# Altium PCB PCB1.PcbDoc (part 3 of 3)
Units mm, origin at the board's own origin, x right, y up, seen from the top; angles counter-clockwise.
Board outline 65.15 x 55.25 mm, 4 copper layers (Top Layer, Int1 (GND), Int2 (PWR), Bottom Layer), stack 1.369 mm thick; 135 components, 113 nets, 463 pads, 324 vias.
Unrouted connection lines stored in the file: 1.
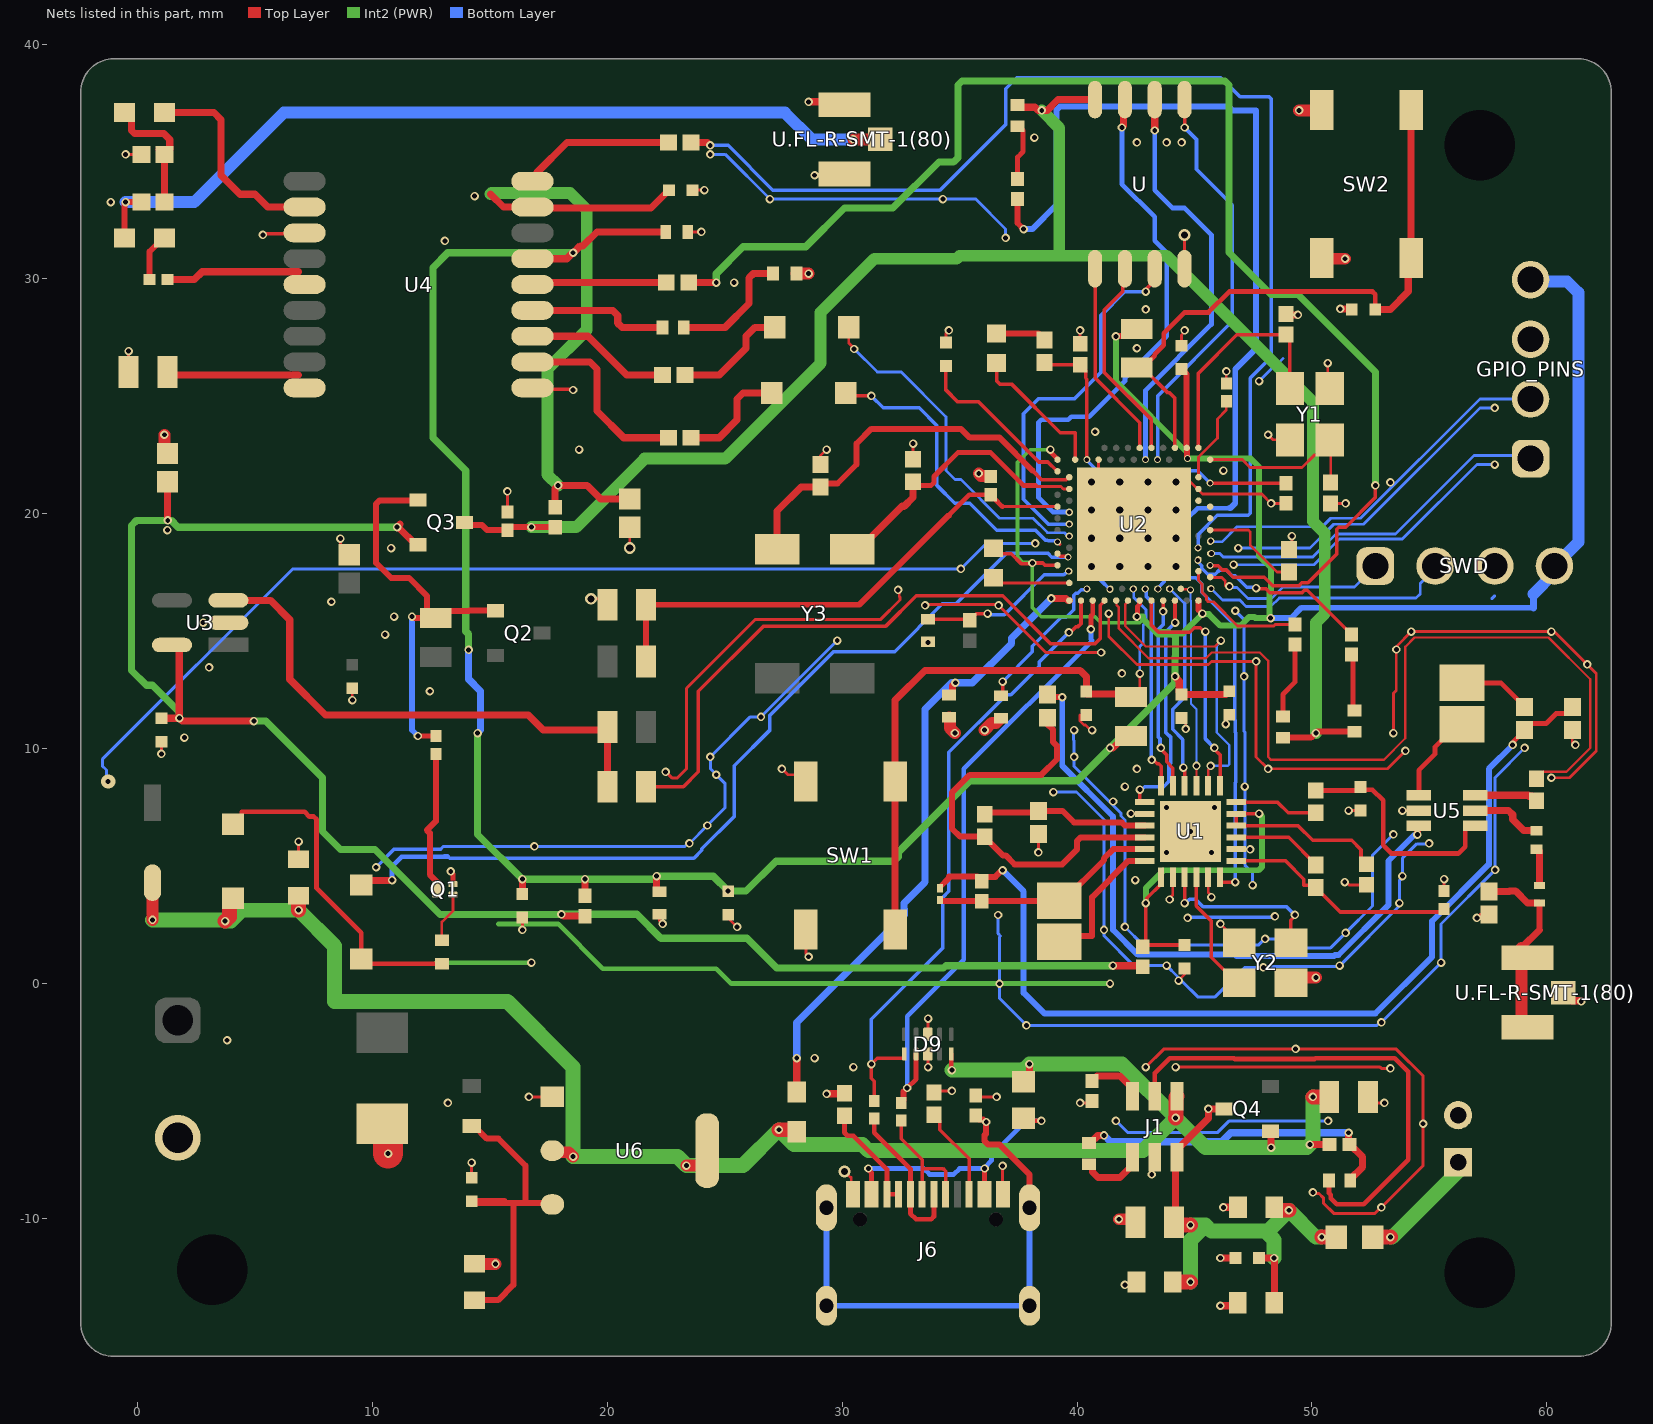
[diagram p4: the nets of this part, all layers, seen from the top]

## Via types
v1: diameter 0.36, hole 0.21, Top Layer to Bottom Layer, 294 vias
v2: diameter 0.3, hole 0.2, Top Layer to Bottom Layer, 24 vias
v3: diameter 0.5, hole 0.3, Top Layer to Bottom Layer, 4 vias
v4: diameter 0.6, hole 0.21, Top Layer to Bottom Layer, 1 vias
v5: diameter 0.5, hole 0.21, Top Layer to Bottom Layer, 1 vias

## Nets (pads, with @x,y where several pads share a name; then routed paths per layer and width w, separated by ;. In a path a pad name is that pad's centre, name@x,y a point inside that pad or via, vN(x,y) a via of type N, cw(c..) or ccw(c..) an arc to the next point about the centre after c; other vN are vias at no path point) (continued)
GND: C1.2 C2.1 C4.2 C5.2 C8.1 C9.2 C11.2 C12.2 C13.2 C14.2 C15.2 C16.2 C17.2 C18.2 C19.2 C20.2 C21.2 C22.1 C24.1 C25.1 C26.2 C27.2 C28.2 C29.2 C30.2 C31.1 C32.2 C33.1 C34.2 C35.2 C39.2 C40.1 C42.2 C43.1 C44.2 C45.2 C46.2 C47.2 C48.1 C49.2 C50.2 C51.2 C52.2 C53.2 C5210584.2 D9.3 D9.8 D11.1 GPIO_PINS.3 J1.2 J6.A1_B12 J6.B1_A12 Q1.2 R2.1 R9.1 R14.2 R17.2 R18.2 R21.1 R26.1 R29.2 R32.2 S2B-PH-K-S(LF)(SN).2 SW1.1 SW1.2 SW2.1 SW2.2 SWD.3 U1.2 U1.5 U1.8 U1.20 U1.25 U2.74 U2.74_1 U2.74_2 U2.74_3 U2.74_4 U2.74_5 U2.74_6 U2.74_7 U2.74_8 U2.74_9 U2.74_10 U2.74_11 U2.74_12 U2.74_13 U2.74_14 U2.74_15 U2.74_16 U2.B7 U2.F23 U3.2 U4.1 U4.12 U5.2 U6.1 U.4 U.FL-R-SMT-1(80).1@60.707,-0.381 U.FL-R-SMT-1(80).2@30.099,37.416 U.FL-R-SMT-1(80).3@30.099,34.466 Y1.2 Y1.4 Y2.2 Y2.4 | length 418.7
  Top Layer w0.12: v1(-0.508,35.306) C22.1@0.163,35.306 ; v1(-0.381,26.924) R9.1@-0.38,26.035 R9.1@-0.38,26.035 ; v1(1.016,9.779) C52.2@1.016,10.295 ; v1(2.794,15.367) U3.2@3.868,15.367 ; C53.2@6.858,5.296 v1(6.858,6.045) ; v1(8.636,18.949) 8.636,18.635 C43.1@9.017,18.254 ; v1(9.144,12.065) C48.1@9.144,12.573 ; C49.2@14.224,-8.263 v1(14.224,-7.62) ; C45.2@14.351,-11.925 14.417,-11.925 C45.2@14.732,-11.61 ; C31.1@15.748,20.084 v1(15.748,20.955) ; v1(16.383,2.286) C30.2@16.383,2.81 ; v1(16.66,-4.826) 17.656,-4.826 U6.1@17.66,-4.822 ; v3(19.304,16.383) 19.749,16.383 R2.1@20.003,16.129 ; v3(20.955,18.542) C14.2@20.955,19.431 ; C12.2@22.225,2.954 22.225,2.667 v1(22.352,2.54) ; C11.2@23.429,32.004 v1(24.003,32.004) ; C19.2@23.622,33.782 v1(24.13,33.782) ; C28.2@25.146,2.929 25.146,2.794 v1(25.527,2.413) ; v1(27.432,9.144) 27.687,8.889 28.175,8.889 SW1.1@28.453,8.611 ; SW1.2@28.453,2.311 28.453,1.265 v1(28.575,1.143) ; v1(28.829,34.417) 30.05,34.417 30.099,34.466 ; C24.1@29.083,22.098 29.083,22.479 v1(29.337,22.733) ; R18.2@30.071,-4.699 R18.2@30.099,-4.671 ; v3(30.099,-8.001) 30.353,-8.255 30.385,-8.255 J6.A1_B12@30.385,-8.896 ; C25.1@33.02,22.323 v1(33.02,22.987) ; D9.3@33.647,-2.994 33.655,-3.002 v1(33.655,-3.556) ; D9.8@33.647,-2.159 33.651,-2.155 33.651,-1.493 v1(33.655,-1.489) ; v1(33.655,14.514) C15.2@33.655,14.559 ; R17.2@33.909,-4.638 33.975,-4.572 v1(34.671,-4.572) ; C13.2@34.417,27.297 34.417,27.686 v1(34.544,27.813) ; R21.1@35.687,-4.771 35.742,-4.826 v1(36.576,-4.826) ; J6.B1_A12@36.83,-8.737 v1(36.83,-7.759) ; v1(38.354,5.588) C40.1@38.354,6.368 ; v1(40.132,-5.08) 40.557,-5.08 R29.2@40.64,-4.997 ; 40.132,11.438 40.132,11.177 40.301,11.008 40.362,11.008 40.575,10.795 v1(40.64,10.795) ; C2.1@40.132,27.237 v1(40.132,27.813) ; U2.74_1@40.618,21.358 40.618,21.437 40.918,21.737 U2.B7@40.918,22.308 ; v1(41.35,15.75) 41.35,14.784 42.549,13.585 45.589,13.585 45.72,13.716 v1(47.625,13.716) ; v1(42.037,-12.827) 42.405,-12.827 C47.2@42.532,-12.7 ; v1(42.291,7.239) 42.297,7.233 42.88,7.233 U1.20@42.886,7.227 ; v1(43.18,-8.128) 43.18,-7.523 J1.2@43.307,-7.396 ; v1(43.942,3.579) 43.942,3.644 44.075,3.777 44.075,4.526 U1.2@44.081,4.532 ; U2.74_4@44.218,21.358 44.835,21.358 45.135,21.058 U2.F23@45.168,21.058 45.168,21.016 45.339,20.845 47.862,20.845 v1(48.26,20.447) C1.2@48.895,20.447 ; v1(44.323,0.127) 44.577,0.381 C34.2@44.577,0.643 ; C29.2@44.45,11.311 44.626,11.134 v1(44.626,10.844) ; C27.2@44.45,27.162 44.45,27.621 44.577,27.748 v1(44.577,27.813) ; U.4@44.577,30.436 v3(44.577,31.877) ; U1.5@45.581,4.532 45.587,4.526 45.587,3.881 45.72,3.748 v1(45.72,3.683) ; v1(46.101,2.54) 46.902,1.739 Y2.2@46.906,1.739 ; v1(46.331,11.049) 46.331,11.295 C9.2@46.482,11.446 ; v1@46.339,26.049 v1(46.355,26.065) C4.2@46.355,25.552 ; U1.8@46.776,5.727 46.782,5.721 47.365,5.721 v1(47.371,5.715) ; C44.2@46.787,-13.653 C44.2@46.85,-13.589 ; v1@47.595,13.686 47.625,13.655 47.625,9.652 v1(48.133,9.144) 53.213,9.144 v1(53.975,9.906) ; v1(48.133,23.368) 48.344,23.157 Y1.2@49.061,23.157 ; C5.2@49.022,18.483 49.149,18.61 v1(49.149,19.05) ; v1(50.673,26.416) 50.673,25.445 Y1.4@50.761,25.357 ; C16.2@50.8,20.447 v1(51.435,20.447) ; v1(51.399,4.318) 51.464,4.318 51.591,4.191 52.315,4.191 C33.1@52.324,4.2 ; v1(51.562,7.366) 51.57,7.374 C35.2@52.07,7.374 ; R32.2@52.387,-4.826 52.641,-5.08 v1(53.086,-5.08) ; v1(53.467,10.668) 53.467,12.36 53.594,12.487 v1(53.594,14.224) 53.619,14.249 53.619,14.376 v1(54.229,14.986) v1(60.198,14.986) 60.223,14.961 60.35,14.961 v1(61.722,13.589) 62.103,13.208 62.103,9.906 60.96,8.763 v1(60.198,8.763) ; v1(53.848,7.366) U5.2@54.553,7.366 ; C42.2@55.626,3.935 v1(55.626,4.445) ; v1(57.023,2.794) 57.168,2.939 C32.2@57.531,2.939 ; C39.2@61.087,10.795 61.087,10.287 v1(61.214,10.16)
  Top Layer w0.127: v1(22.479,9.017) 22.495,9.017 22.749,8.763 22.987,8.763 23.368,9.144 23.368,12.573 26.289,15.494 31.623,15.494 32.459,16.33 32.459,16.457 32.43,16.486 32.43,16.719 v1(32.385,16.764) ; v1(33.528,16.105) 33.564,16.141 36.626,16.141 38.67,14.097 v1(41.021,14.097) ; v1(42.926,-3.556) 43.688,-2.794 49.29,-2.794 v1(49.305,-2.78) ; v1(44.196,-3.556) 52.906,-3.556 52.957,-3.607 v1(53.34,-3.607) ; v1@49.276,-2.794 53.594,-2.794 54.737,-3.937 54.737,-7.747 v1(52.959,-9.525) 52.943,-9.525 52.689,-9.779 50.927,-9.779 50.486,-9.338 50.486,-9.117 50.303,-8.935 50.083,-8.935 v1(50.038,-8.89)
  Top Layer w0.152: v1(5.334,31.877) 5.374,31.917 7.066,31.917 U4.12@7.112,31.963 ; U4.1@16.812,25.363 16.862,25.313 18.502,25.313 v1(18.542,25.273)
  Top Layer w0.203: v1(13.335,4.775) 13.335,4.762 13.431,4.666 Q1.2@13.431,4.238
  Top Layer w0.305: v1(28.575,37.543) 29.972,37.543 30.099,37.416 ; v1(29.337,-4.699) 29.348,-4.688 30.06,-4.688 R18.2@30.071,-4.699 ; v1(46.101,-13.716) 46.723,-13.716 C44.2@46.787,-13.653 ; v1(46.101,-11.684) C50.2@46.744,-11.684 ; v1(46.228,-9.525) C46.2@46.85,-9.525 ; C17.2@48.895,28.507 48.93,28.472 v1(49.403,28.472) ; v1(51.205,28.726) 51.215,28.715 51.684,28.715 C26.2@51.697,28.702 ; 60.707,-0.381 61.055,-0.729 61.435,-0.729 v1(61.468,-0.762)
  Top Layer w0.508: v1(1.143,23.368) 1.143,22.699 C51.2@1.27,22.572 ; C45.2@14.351,-11.925 14.364,-11.938 v1(15.24,-11.938) ; R14.2@28.059,30.226 v1(28.575,30.226) ; C21.2@34.544,11.336 34.561,11.336 34.59,11.307 34.59,10.876 v1(34.797,10.669) ; v1(35.814,21.717) 35.915,21.616 36.316,21.616 36.322,21.61 C8.1@36.322,21.59 ; v1(36.068,10.795) 36.375,11.102 36.55,11.102 C20.2@36.722,11.274 ; v1(41.783,-10.033) 42.355,-10.033 R26.1@42.482,-10.16 ; Y2.4@49.106,0.039 49.321,0.254 v1(50.165,0.254) ; v1(49.457,37.176) 50.414,37.176 SW2.1@50.424,37.186 ; SW2.2@50.424,30.886 50.449,30.861 v1(51.411,30.861)
  Top Layer w1.27: D11.1@10.414,-5.969 10.445,-5.969 10.668,-6.192 v1(10.668,-7.239)
  Int2 (PWR) w0.203: 12.7,0.889 v1(16.764,0.889) ; 15.367,2.54 17.907,2.54 19.812,0.635 24.638,0.635 25.273,0 36.692,0 v1(36.697,-0.006) ; v1@36.697,0 v1(41.402,0)
  Bottom Layer w0.12: v1@46.681,17.835 50.093,17.835 51.181,18.923 53.848,18.923 57.023,22.098 v1(57.785,22.098) ; v1(46.863,18.542) 49.911,18.542 50.927,19.558 52.197,19.558 57.15,24.511 v1(57.785,24.511) ; 57.658,16.383 57.785,16.51
  Bottom Layer w0.127: v4(-1.25,8.6) -1.327,8.677 -1.327,9.09 -1.5,9.263 -1.5,9.549 6.604,17.653 v1(35.052,17.653) 36.139,18.74 38.22,18.74 v1(38.221,18.742) ; 12.912,5.728 13.026,5.842 23.305,5.842 23.432,5.969 v1(23.495,5.969) v1(24.257,6.731) 25.019,7.493 25.019,8.509 v1(24.638,8.89) 24.638,8.906 24.384,9.16 v1(24.384,9.652) 26.09,11.358 v1(26.543,11.358) v1(29.79,14.605) ; v1(24.384,35.306) 25.019,35.306 v1(26.924,33.401) v1(34.29,33.401) 35.687,33.401 36.957,32.131 v1(36.957,31.75) ; v1(36.642,2.919) 36.642,2.124 36.745,2.021 36.703,1.979 v1@36.703,0 ; v1(38.989,8.154) 39.979,8.154 41.148,6.985 v1(41.148,2.286) 41.148,2.032 42.418,0.762 v1(43.815,0.762) 44.278,0.299 44.278,0.235 44.323,0.191 44.386,0.191 44.386,0.127 44.431,0.082 44.495,0.082 45.138,-0.561 45.88,-0.561 47.127,0.686 47.825,0.686 47.879,0.74 47.879,0.762 47.917,0.724 51.143,0.724 v1(51.181,0.762) 53.697,3.278 53.697,3.405 v1(53.721,3.429) 53.721,4.382 53.848,4.509 53.848,5.334 54.467,5.953 54.975,5.953 v1(54.991,5.969) ; v1(39.878,10.795) 39.85,10.767 39.85,10.361 39.878,10.333 39.878,9.245 v1@41.452,7.67 ; v1(41.535,7.753) v1@41.452,7.67 ; v1(41.656,-5.842) 42.164,-6.35 45.974,-6.35 46.482,-5.842 v1(50.685,-5.842) ; v1(46.736,15.875) 47.117,15.494 v1(47.117,13.081) 47.117,10.729 47.141,10.705 v1@47.141,8.406 ; v1(47.141,8.382) 47.141,5.043 47.475,4.71 v1(47.475,4.191) ; v1(47.752,25.654) 48.372,26.274 48.425,26.274 48.768,26.617 ; v1(47.933,0.686) v1@47.933,0.762 ; v1(53.467,6.35) 52.583,5.466 52.583,3.307 v1(51.435,2.159) 50.8,1.524 49.526,1.524 49.145,1.905 47.99,1.905 47.736,1.651 42.799,1.651 v1(42.037,2.413) 42.037,6.969 41.869,7.137 41.869,7.253 v1@41.452,7.67 ; v1(59.055,10.033) 57.801,8.779 v1(57.801,4.842) 55.499,2.54 v1(55.499,0.889) v1(52.959,-1.651) 52.896,-1.651 52.769,-1.778 v1(37.846,-1.778) 36.697,-0.629 v1(36.697,-0.006) ; v1(36.697,-0.006) v1@36.703,0 ; v1(36.697,-0.006) v1@36.703,0
  Bottom Layer w0.152: v1(10.16,4.953) 10.935,5.728 12.912,5.728 ; v1(44.704,2.794) 44.738,2.828 48.393,2.828 v1(48.426,2.861)
  other v1: 54.737,-5.969 13.208,-5.08 30.48,-3.556 28.829,-3.175 3.81,-2.413 48.006,1.905 42.478,4.406 53.848,4.572 43.815,5.588 45.72,5.588 16.891,5.842 44.831,6.477 43.815,7.493 45.847,7.493 42.037,8.382 42.545,9.144 39.878,9.652 1.993,10.474 12.446,12.446 41.91,13.208 3.048,13.462 10.541,14.859 10.922,15.621 36.662,16.105 8.255,16.256 46.67,17.835 10.795,18.542 1.27,19.304 53.34,21.336 46.228,21.844 18.796,22.733 40.767,23.495 42.545,27.051 42.926,28.702 25.4,29.845 13.081,31.623 -1.143,33.274 14.351,33.528 42.545,35.814 43.815,35.814 44.45,35.814 38.181,36.022
"Net3.7 V CELL_1": F1.1 S2B-PH-K-S(LF)(SN).1 | length 4.8
  Top Layer w0.635: F1.1@52.591,-10.795 v1(53.34,-10.795)
  Int2 (PWR) w0.635: v1(53.34,-10.795) 53.414,-10.795 56.224,-7.985
NetC1_1: C1.1 C2.2 L3.1 U2.B5 U2.E24 | length 14.6
  Top Layer w0.15: L3.1@38.608,26.445 38.696,26.357 C2.2@40.132,26.357 40.367,26.122 40.367,25.785 40.418,25.734 v2(40.418,22.308) ; v2(45.668,21.308) 48.891,21.308 C1.1@48.895,21.304
  Bottom Layer w0.15: v2(40.418,22.308) 40.418,22.281 40.866,21.833 45.143,21.833 v2(45.668,21.308)
NetC4_1: C4.1 U2.D23 | length 3.7
  Top Layer w0.12: U2.D23@45.168,21.558 45.168,22.416 45.974,23.222 45.974,24.033 46.355,24.414 C4.1@46.355,24.795
NetC5_1: C5.1 U2.N24 | length 4.4
  Top Layer w0.12: U2.N24@45.668,19.308 47.297,19.308 47.371,19.234 47.371,18.669 48.514,17.526 C5.1@49.022,17.526
NetC8_2: C8.2 R1.1 R2.2 U2.J1 | length 22.1
  Top Layer w0.127: 36.824,20.308 U2.J1@39.168,20.308
  Top Layer w0.203: 34.544,19.939 35.415,20.81 C8.2@36.322,20.81 36.322,20.79 36.48,20.632 36.5,20.632 36.824,20.308
  Top Layer w0.254: R1.1@21.653,13.716 R2.2@21.653,16.129 30.734,16.129 34.544,19.939
NetC13_1: C13.1 U2.C1 | length 7.2
  Top Layer w0.154: C13.1@34.417,26.297 34.417,25.273 34.925,24.765 35.814,24.765 38.37,22.209 38.754,22.209 39.155,21.808 U2.C1@39.168,21.808
NetC16_1: C16.1 U2.B24 Y1.3 | length 7.6
  Top Layer w0.12: U2.B24@45.668,22.308 47.034,22.308 47.371,21.971 49.575,21.971 50.121,22.517 50.221,22.517 50.761,23.057 50.761,23.157 50.8,23.118 C16.1@50.8,21.327
NetC17_1: C17.1 U2.A23 Y1.1 | length 9.9
  Top Layer w0.15: U2.A23@45.168,22.808 45.168,25.991 46.804,27.627 48.875,27.627 49.061,27.441 Y1.1@49.061,25.357
NetC18_1: C18.1 R10.1 SW1.3 SW1.4 U2.AC13 | length 26.2
  Top Layer w0.12: R10.1@42.291,12.192 42.307,12.192 42.672,12.557 v1(42.672,13.195)
  Top Layer w0.305: SW1.4@32.253,2.311 SW1.3@32.253,8.611 32.253,12.06 33.528,13.335 40.132,13.335 40.395,13.072 C18.1@40.395,12.438 ; C18.1@40.395,12.332 42.151,12.332 R10.1@42.291,12.192
  Bottom Layer w0.12: v2(42.388,16.803) 42.412,16.779 42.412,16.44 42.935,15.917 42.935,15.382 42.816,15.262 42.816,14.498 42.672,14.354 v1(42.672,13.195)
NetC20_1: C20.1 U2.AC5 | length 6.4
  Top Layer w0.15: C20.1@36.768,12.253 36.83,12.315 v1(36.83,12.853)
  Bottom Layer w0.15: v1(36.83,12.853) 38.1,14.122 38.1,14.367 39.329,15.597 39.538,15.597 39.857,15.916 39.857,16.528 39.945,16.616 40.032,16.616 40.183,16.768 40.378,16.768 v2(40.418,16.808)
NetC22_2: C22.2 C23.1 R20.2 | length 5.9
  Top Layer w0.305: R20.2@-0.557,37.084 -0.507,37.084 -0.259,36.836 -0.259,36.327 -0.127,36.195 1.113,36.195 1.371,35.937 1.371,35.514 1.367,35.51 0.919,35.51 1.123,35.306 C22.2@1.143,35.306 C23.1@1.143,33.274
NetC23_2: C23.2 R19.2 U.FL-R-SMT-1(80).1@31.624,35.941 | length 36.4
  Top Layer w0.254: R19.2@-0.557,31.75 -0.557,33.225 v1(-0.508,33.274) C23.2@0.163,33.274
  Top Layer w0.508: v1(30.48,35.941) 31.624,35.941
  Bottom Layer w0.508: v1(-0.508,33.274) 2.413,33.274 6.223,37.084 27.559,37.084 28.702,35.941 v1(30.48,35.941)
NetC24_2: C24.2 U2.D2 Y3.1 | length 17
  Top Layer w0.152: 38.1,21.844 38.488,21.456 39.271,21.456 39.533,21.456 39.635,21.558 U2.D2@39.668,21.558
  Top Layer w0.254: C24.2@29.083,21.141 29.233,21.291 29.8,21.291 30.607,22.098 30.607,22.987 31.242,23.622 35.052,23.622 35.433,23.241 36.703,23.241 38.1,21.844
  Top Layer w0.305: Y3.1@27.229,18.498 27.229,20.117 28.253,21.141 C24.2@29.083,21.141
NetC25_2: C25.2 U2.F2 Y3.4 | length 12.3
  Top Layer w0.127: 38.227,21.209 38.277,21.159 39.313,21.159 39.414,21.058 U2.F2@39.668,21.058
  Top Layer w0.203: C25.2@33.02,21.365 33.176,21.209 33.79,21.209 33.909,21.328 33.909,21.59 34.925,22.606 36.322,22.606 37.719,21.209 38.227,21.209
  Top Layer w0.305: Y3.4@30.429,18.498 30.729,18.498 32.551,20.32 32.639,20.32 33.02,20.701 C25.2@33.02,21.365
NetC26_1: C26.1 R13.1 SW2.3 SW2.4 U2.A20 | length 26
  Top Layer w0.15: R13.1@42.795,26.226 43.875,25.146 43.942,25.146 44.168,24.92 U2.A20@44.168,22.808
  Top Layer w0.203: R13.1@42.545,26.226 42.795,26.226 43.307,26.738 43.307,26.797 43.688,27.178 43.688,27.686 44.577,28.575 45.593,28.575 46.482,29.464 52.578,29.464 52.697,29.345 C26.1@52.697,28.702
  Top Layer w0.305: C26.1@52.697,28.702 53.34,28.702 54.102,29.464 54.102,30.764 SW2.4@54.224,30.886 SW2.3@54.224,37.186
NetC32_1: C32.1 L4.1 U.FL-R-SMT-1(80).2@59.182,1.094 U.FL-R-SMT-1(80).3@59.182,-1.856 | length 8.1
  Top Layer w0.254: 59.69,2.286 L4.1@59.69,3.435
  Top Layer w0.305: C32.1@57.531,3.919 58.402,3.919 58.42,3.937 58.674,3.937 59.182,3.429 59.435,3.429 59.438,3.433 59.688,3.433 L4.1@59.69,3.435 ; 58.928,1.524 59.69,2.286
  Top Layer w0.508: 58.928,1.524 58.928,-1.602 59.182,-1.856
NetC35_1: C35.1 R15.2 U5.4 | length 10.1
  Top Layer w0.203: R15.2@50.165,8.222 51.918,8.222 C35.1@52.07,8.374 52.189,8.255 52.578,8.255 53.035,7.798 53.035,5.893 53.391,5.537 56.233,5.537 56.53,5.834 56.53,6.593 56.653,6.716 U5.4@56.953,6.716
NetC36_1: C36.1 L4.2 | length 1.6
  Top Layer w0.305: C36.1@59.563,5.715 59.613,5.715 59.69,5.638 L4.2@59.69,4.185
NetC36_2: C36.2 U5.5 | length 3.1
  Top Layer w0.305: U5.5@56.953,7.366 58.368,7.366 58.547,7.187 58.547,6.985 59.017,6.515 C36.2@59.563,6.515
NetC37_1: C37.1 L6.2 | length 3.1
  Top Layer w0.203: L6.2@56.388,12.801 58.049,12.801 59.055,11.795 C37.1@59.055,11.775
NetC37_2: C37.2 C39.1 C41.1 L8.1 | length 41.3
  Top Layer w0.203: v1(58.547,10.16) 58.556,10.169 58.556,10.276 59.055,10.775 59.055,10.815 59.313,11.073 59.968,11.073 60.392,11.497 60.829,11.497 61.087,11.755 C39.1@61.087,11.775
  Top Layer w0.254: L8.1@34.163,4.064 34.163,4.11 34.544,4.491 34.544,4.55 35.756,4.55 35.76,4.546 35.782,4.546 C41.1@35.941,4.387 ; v1(36.83,4.826) 36.801,4.826 36.522,4.546 36.1,4.546 C41.1@35.941,4.387 ; C41.1@35.941,4.387 C41.1@35.941,4.366 C41.1@35.941,4.387
  Bottom Layer w0.254: v1(36.83,4.826) 37.729,3.927 37.729,-0.391 38.608,-1.27 52.705,-1.27 55.118,1.143 55.118,2.667 57.531,5.08 57.531,9.144 v1(58.547,10.16)
NetC38_1: C38.1 U5.3 | length 28.5
  Top Layer w0.254: C38.1@38.735,12.301 38.844,12.192 v1(39.37,12.192)
  Top Layer w0.305: v1(54.49,6.346) 54.49,6.653 U5.3@54.553,6.716
  Bottom Layer w0.254: v1(39.37,12.192) 39.37,9.271 41.529,7.112 41.529,2.286 42.586,1.229 46.74,1.229 46.786,1.184 50.941,1.184 50.977,1.219 51.13,1.219 53.254,3.343 53.254,5.221 54.358,6.326 54.47,6.326 v1(54.49,6.346)
NetC38_2: C38.2 L7.2 U1.22 | length 17.8
  Top Layer w0.254: C38.2@38.735,11.049 38.968,10.816 38.968,10.291 39.153,10.106 39.153,9.562 38.481,8.89 35.433,8.89 34.671,8.128 34.671,6.604 35.023,6.252 L7.2@36.068,6.252 36.068,6.231 36.838,5.461 36.957,5.461 37.338,5.08 39.37,5.08 40.005,5.715 40.005,6.078 40.154,6.227 U1.22@42.886,6.227
NetC40_2: C40.2 L7.1 U1.21 | length 7.1
  Top Layer w0.254: L7.1@36.068,7.21 36.137,7.279 38.285,7.279 C40.2@38.354,7.348 39.388,7.348 39.878,6.858 41.91,6.858 42.041,6.727 U1.21@42.886,6.727
NetC41_2: C41.2 L8.2 L9.1 U1.23 | length 9.7
  Top Layer w0.254: L8.2@34.163,3.556 34.163,3.513 34.167,3.508 C41.2@35.941,3.508 39.222,3.508 L9.1@39.243,3.53 39.419,3.53 41.148,5.259 41.148,5.334 41.541,5.727 U1.23@42.886,5.727
NetC42_1: C42.1 L10.2 U1.7 | length 10
  Top Layer w0.15: U1.7@46.776,5.227 48.875,5.227 49.657,4.445 49.657,4.191 50.067,4.191 L10.2@50.165,4.093 50.165,4.072 50.426,3.811 50.448,3.811 51.21,3.048 55.497,3.048 C42.1@55.626,3.177
NetC45_1: C45.1 C49.1 D12.1 U6.3 | length 14.9
  Top Layer w0.254: D12.1@14.224,-6.057 14.324,-6.057 14.871,-6.604 15.367,-6.604 16.51,-7.747 16.51,-9.333 ; C45.1@14.351,-13.475 15.354,-13.475 16.002,-12.827 16.002,-9.333 ; C49.1@14.351,-9.39 C49.1@14.224,-9.263 14.351,-9.263 15.621,-9.263 ; C49.1@14.351,-9.333 15.621,-9.333 16.002,-9.333 ; U6.3@17.66,-9.402 17.591,-9.333 16.51,-9.333 ; 16.002,-9.333 16.51,-9.333
NetD1_1: D1.1 D2.1 R31.2 | length 14
  Top Layer w0.203: D1.1@4.064,6.782 4.089,6.782 4.437,7.13 4.437,7.315 7.112,7.315 7.315,7.112 7.501,7.112 7.62,6.993 7.62,4.064 9.525,2.159 D2.1@9.525,1.041 ; D2.1@9.72,0.846 R31.2@12.954,0.846
NetD2_2: D2.2 U2.U1 | length 38.5
  Top Layer w0.15: 39.276,18.201 39.284,18.193 39.583,18.193 v2(39.623,18.153)
  Top Layer w0.305: D2.2@9.525,4.191 9.729,4.395 10.823,4.395 v1(10.834,4.406)
  Bottom Layer w0.15: 13.208,5.413 13.285,5.336 23.689,5.336 24.027,5.674 24.027,5.739 25.4,7.112 25.4,9.271 26.924,10.795 26.924,11.43 29.629,14.135 32.232,14.135 34.264,16.168 34.846,16.168 36.99,18.312 38.771,18.312 38.93,18.153 v2(39.623,18.153)
  Bottom Layer w0.203: v1(10.834,4.406) 10.834,4.992 11.242,5.4 13.048,5.4 13.06,5.413 13.208,5.413
NetD3_1: D3.1 R3.2 | length 2.4
  Top Layer w0.203: R3.2@51.689,14.009 51.752,13.946 51.752,11.69 D3.1@51.816,11.626
NetD4_1: D4.1 R4.2 | length 2.5
  Top Layer w0.203: R4.2@37.465,34.251 37.465,35.193 37.698,35.426 37.698,36.324 37.515,36.507 D4.1@37.465,36.507
NetD5_1: D5.1 R5.2 | length 3.3
  Top Layer w0.203: D5.1@48.768,11.372 48.768,12.319 49.276,12.827 R5.2@49.276,14.434
NetD6_1: D6.1 U2.P2 | length 14.8
  Top Layer w0.12: D6.1@30.277,27.94 30.277,27.279 30.512,27.044 v1(30.512,27.019)
  Bottom Layer w0.12: v1(30.512,27.019) 31.496,26.035 32.512,26.035 34.417,24.13 34.417,21.844 34.798,21.463 35.052,21.463 36.703,19.812 38.126,19.812 38.74,19.198 39.453,19.198 39.603,19.048 v2(39.668,19.048)
NetD6_2: D6.2 R12.2 | length 5
  Top Layer w0.305: R12.2@23.309,25.908 24.765,25.908 25.908,27.051 25.908,27.559 26.289,27.94 D6.2@27.127,27.94
NetD7_1: D7.1 R11.2 | length 4.7
  Top Layer w0.305: R11.2@23.563,23.241 24.765,23.241 25.527,24.003 25.527,24.892 25.781,25.146 D7.1@27,25.146
NetD7_2: D7.2 U2.R1 | length 13.3
  Top Layer w0.15: D7.2@30.15,25.146 30.277,25.019 v1(31.242,25.019) ; v2(39.168,18.808) v2@39.265,18.711
  Bottom Layer w0.15: v1(31.242,25.019) 31.75,24.511 33.274,24.511 34.036,23.749 34.036,21.209 34.798,20.447 35.433,20.447 36.576,19.304 38.231,19.304 38.656,18.879 38.74,18.879 38.771,18.848 39.128,18.848 v2(39.168,18.808)
NetD9_1: D9.1 R23.2 U2.AD4 | length 26.9
  Top Layer w0.15: R23.2@31.369,-4.998 31.369,-4.152 31.242,-4.025 v1(31.242,-3.429) 31.496,-3.175 32.622,-3.175 32.647,-3.15 D9.1@32.647,-2.994 ; v1(39.65,14.95) 39.707,14.95 39.959,15.202 40.042,15.202 40.168,15.328 U2.AD4@40.168,16.308
  Bottom Layer w0.15: v1(31.242,-3.429) 31.242,-1.524 34.29,1.524 34.29,3.683 34.544,3.937 34.544,9.844 36.995,12.295 37.187,12.295 38.398,13.506 38.398,13.698 v1(39.65,14.95)
NetD9_2: D9.2 R22.2 U2.AD6 | length 26.4
  Top Layer w0.203: v1(32.766,-4.445) 33.147,-4.064 D9.2@33.147,-2.994 ; v1(40.588,15.086) 40.588,15.654 40.668,15.733 U2.AD6@40.668,16.308
  Top Layer w0.254: R22.2@32.512,-5.08 32.61,-4.982 32.61,-4.601 v1(32.766,-4.445)
  Bottom Layer w0.203: v1(32.766,-4.445) 32.766,-1.397 35.179,1.016 35.179,9.144 40.64,14.605 40.589,14.656 v1(40.588,15.086) v1(40.588,15.086)
NetD10_1: D10.1 R14.1 | length 5.4
  Top Layer w0.305: D10.1@23.252,27.94 25.019,27.94 26.035,28.956 26.035,30.047 26.214,30.226 R14.1@27.059,30.226
NetD10_2: D10.2 U4.4 | length 6
  Top Layer w0.305: U4.4@16.812,28.663 20.232,28.663 20.447,28.448 20.447,28.119 20.626,27.94 D10.2@22.352,27.94
NetD13_1: D13.1 J1.1 | length 2.8
  Top Layer w0.305: D13.1@40.513,-7.689 40.563,-7.689 40.661,-7.787 40.661,-8.022 40.894,-8.255 41.823,-8.255 42.357,-7.721 J1.1@42.357,-7.396
NetD13_2: D13.2 D14.2 R30.2 | length 14
  Top Layer w0.305: D13.2@40.513,-6.789 40.563,-6.789 40.877,-6.475 41.137,-6.475 v1(41.148,-6.465) ; v1(51.562,-6.35) 51.562,-6.814 R30.2@51.606,-6.858 51.631,-6.858 52.16,-7.387 52.16,-7.803 51.631,-8.332 D14.2@51.631,-8.382
  Bottom Layer w0.305: v1(41.148,-6.465) 41.163,-6.465 41.429,-6.731 46.164,-6.731 46.545,-6.35 v1(51.562,-6.35)
NetD14_1: D14.1 J1.5 | length 21
  Top Layer w0.203: J1.5@43.307,-4.796 43.307,-3.81 43.942,-3.175 46.687,-3.175 46.724,-3.211 50.108,-3.211 50.145,-3.175 53.529,-3.175 54.102,-3.748 54.102,-7.493 52.197,-9.398 51.054,-9.398 50.801,-9.145 50.801,-8.987 50.731,-8.917 D14.1@50.731,-8.382
NetF2_1: F2.1 J6.A4_B9 J6.B4_A9 | length 11.6
  Top Layer w0.203: v1(31.115,-7.874) 31.115,-7.916 31.249,-8.05 31.249,-8.959 J6.A4_B9@31.255,-8.966 ; J6.B4_A9@36.055,-8.966 36.061,-8.959 36.061,-7.881 v1(36.068,-7.874) ; F2.1@37.719,-5.728 37.833,-5.842 v1(38.481,-5.842)
  Bottom Layer w0.203: v1(31.115,-7.874) 33.465,-7.874 33.719,-8.128 34.745,-8.128 34.999,-7.874 v1(36.068,-7.874) 36.068,-7.832 36.356,-7.544 36.356,-7.332 37.846,-5.842 v1(38.481,-5.842)
NetGPIO_PINS_1: GPIO_PINS.1 U2.U24 | length 15.5
  Bottom Layer w0.12: v2(45.722,18.312) 45.725,18.31 46.077,18.31 46.225,18.161 50.038,18.161 51.02,19.143 53.56,19.143 56.896,22.479 59.182,22.479 GPIO_PINS.1@59.309,22.352
NetGPIO_PINS_2: GPIO_PINS.2 U2.R24 | length 16.2
  Bottom Layer w0.12: v2(45.691,18.847) 45.73,18.808 46.168,18.808 46.81,19.45 50.438,19.45 50.8,19.812 52.07,19.812 57.15,24.892 GPIO_PINS.2@59.309,24.892
NetJ1_6: J1.6 R29.1 | length 2.4
  Top Layer w0.305: R29.1@40.64,-4.147 40.64,-4.122 40.763,-3.999 40.788,-3.999 40.85,-3.937 41.823,-3.937 42.357,-4.471 J1.6@42.357,-4.796
NetJ6_A5: J6.A5 J6.B8 R18.1 | length 4.7
  Top Layer w0.203: R18.1@30.099,-5.621 30.099,-6.35 30.226,-6.477 30.48,-6.477 31.905,-7.902 J6.B8@31.905,-8.966 J6.A5@32.405,-8.966
NetJ6_A6: J6.A6 J6.B6 R22.1 | length 5.5
  Top Layer w0.15: R22.1@32.512,-5.83 32.512,-6.604 33.405,-7.497 33.405,-7.874 ; J6.A6@33.405,-8.966 33.405,-7.874 ; J6.B6@34.405,-8.966 34.405,-7.989 34.29,-7.874 33.405,-7.874
NetJ6_A7: J6.A7 J6.B7 R23.1 | length 6.8
  Top Layer w0.203: R23.1@31.369,-5.748 31.369,-6.35 32.905,-7.886 J6.B7@32.905,-8.966 32.905,-9.791 33.147,-10.033 33.786,-10.033 33.905,-9.914 J6.A7@33.905,-8.966
NetJ6_B5: J6.B5 R17.1 | length 4
  Top Layer w0.15: R17.1@33.909,-5.588 34.159,-5.838 34.159,-6.219 35.405,-7.465 J6.B5@35.405,-8.966
NetJ6_S1: J6.S1 J6.S2 J6.S3 J6.S4 R21.2 | length 22.3
  Top Layer w0.254: R21.2@35.687,-5.621 35.687,-5.646 35.835,-5.794 36.006,-5.794 36.105,-5.893 v1(36.134,-5.893) 36.113,-5.913 36.113,-6.41 36.068,-6.455 36.068,-6.709 36.217,-6.858 36.703,-6.858 37.98,-8.135 J6.S2@37.98,-9.546
  Bottom Layer w0.254: J6.S1@29.33,-9.546 J6.S3@29.33,-13.716 J6.S4@37.98,-13.716 J6.S2@37.98,-9.546
NetL1_2: L1.2 U2.AB2 | length 3.3
  Top Layer w0.12: L1.2@36.449,17.28 36.671,17.058 U2.AB2@39.668,17.058
NetL2_1: L2.1 U2.B3 | length 6.2
  Top Layer w0.15: L2.1@36.576,26.424 36.576,25.654 36.703,25.527 37.211,25.527 39.283,23.455 39.918,23.455 U2.B3@39.918,22.308
NetL2_2: L2.2 L3.2 | length 2.2
  Top Layer w0.254: L2.2@36.576,27.678 38.354,27.678 38.608,27.424 L3.2@38.608,27.403
NetL6_1: L6.1 U5.1 | length 3.9
  Top Layer w0.203: U5.1@54.553,8.016 54.553,9.087 55.245,9.779 55.245,10.082 56.212,11.049 L6.1@56.388,11.049
NetL9_2: L9.2 U1.24 | length 6
  Top Layer w0.254: L9.2@39.243,1.778 39.497,2.032 40.64,2.032 40.64,3.683 42.184,5.227 U1.24@42.886,5.227
NetL10_1: L10.1 U1.9 | length 3.9
  Top Layer w0.15: U1.9@46.776,6.227 46.78,6.223 49.014,6.223 50.165,5.072 L10.1@50.165,5.051
NetL11_1: L11.1 U4.14 | length 5.7
  Top Layer w0.305: L11.1@1.27,29.972 2.413,29.972 2.751,30.31 6.858,30.31
NetL11_2: L11.2 R19.1 | length 2.1
  Top Layer w0.254: L11.2@0.513,29.972 0.513,31.17 1.093,31.75 R19.1@1.143,31.75
NetQ1_1: Q1.1 R31.1 | length 2.1
  Top Layer w0.12: R31.1@12.954,1.846 12.954,2.616 13.431,3.093 Q1.1@13.431,3.788
NetQ1_3: Q1.3 R28.2 | length 6.2
  Top Layer w0.254: R28.2@12.7,9.781 12.7,6.912 12.319,6.531 12.446,6.404 12.446,4.64 Q1.3@12.827,4.259
  Top Layer w0.305: Q1.3@12.731,4.013 12.731,4.163 Q1.3@12.827,4.259
NetQ2_1: Q2.1 Q3.1 R27.1 R28.1 | length 17.8
  Top Layer w0.203: v1(11.938,10.541) v1(11.938,10.541) 12.699,10.54 R28.1@12.7,10.539
  Top Layer w0.254: v1(11.684,15.621) 11.748,15.557 R27.1@12.47,15.557 ; Q3.1@11.938,20.591 11.921,20.574 10.309,20.574 10.16,20.425 10.16,17.907 10.801,17.266 11.563,17.266 12.319,16.51 12.319,15.708 R27.1@12.47,15.557 ; Q2.1@15.24,15.875 14.133,15.875 14.113,15.855 12.998,15.855 R27.1@12.7,15.557 R27.1@12.47,15.557
  Bottom Layer w0.254: v1(11.684,15.621) 11.684,10.795 v1(11.938,10.541)
NetR3_1: R3.1 U2.V23 | length 8.2
  Top Layer w0.152: v1(47.625,16.834) 47.641,16.818 48.034,16.818 48.21,16.642 49.576,16.642 49.678,16.744 49.804,16.744 51.465,15.083 51.49,15.083 51.689,14.884 R3.1@51.689,14.859
  Bottom Layer w0.152: v2(45.141,18.022) 45.141,17.965 45.312,17.795 45.312,17.689 45.57,17.431 45.888,17.431 46.067,17.61 46.345,17.61 46.594,17.361 46.736,17.361 47.224,16.874 47.585,16.874 v1(47.625,16.834)
NetR4_1: R4.1 U2.AC9 | length 42
  Top Layer w0.08: v2(41.396,16.786) U2.AC9@41.418,16.808
  Top Layer w0.254: R4.1@37.465,33.401 37.465,32.385 v1(37.726,32.124)
  Bottom Layer w0.152: v2(41.396,16.786) 41.021,17.161 41.021,17.34 41.12,17.438 41.12,18.199 41.209,18.288 44.577,18.288
  Bottom Layer w0.203: 44.577,18.288 44.72,18.431 44.72,19.828 45.133,20.241 46.482,20.241
  Bottom Layer w0.254: v1(37.726,32.124) 38.093,32.124 39.116,33.147 39.116,37.189 39.265,37.338 46.46,37.338 46.625,37.174 47.625,37.174 47.625,27.051 46.736,26.162 46.736,20.447 46.53,20.241 46.482,20.241
NetR5_1: R5.1 U2.Y23 | length 5.6
  Top Layer w0.12: U2.Y23@45.168,17.558 45.168,17.156 45.32,17.003 45.32,16.664 45.516,16.469 45.516,16.327 45.586,16.256 45.803,16.256 46.836,15.224 48.379,15.224 48.439,15.284 R5.1@49.276,15.284
NetR7_1: R7.1 U2.T23 | length 50
  Top Layer w0.305: R7.1@23.563,35.814 24.257,35.814 v1(24.384,35.687)
  Bottom Layer w0.15: v1(24.384,35.687) 25.146,35.687 27.051,33.782 34.163,33.782 36.957,36.576 36.957,38.1 37.43,38.573 46.122,38.573 46.94,37.754 48.172,37.754 48.26,37.667 48.26,26.67 47.371,25.781 47.371,20.027 47.283,19.939 45.974,19.939 45.168,19.133 45.168,18.568 v2(45.15,18.55)
NetR7_2: R7.2 U4.9 | length 6.6
  Top Layer w0.305: U4.9@17.018,34.036 17.018,34.544 18.288,35.814 R7.2@22.606,35.814
NetR8_1: R8.1 U2.W24 | length 59
  Top Layer w0.15: v2(45.668,17.808) 45.692,17.784 46.005,17.784 46.18,17.609 46.345,17.609 46.651,17.303 47.975,17.303 48.335,16.943 49.451,16.943 49.573,17.065 49.831,17.065 51.054,18.288 51.054,19.343 51.142,19.431 51.435,19.431 52.705,20.701 v1(52.705,21.209)
  Top Layer w0.305: R8.1@23.466,29.845 v1(24.638,29.845)
  Int2 (PWR) w0.305: v1(24.638,29.845) 24.638,30.226 25.781,31.369 28.448,31.369 30.099,33.02 32.152,33.02 34.117,34.985 34.746,34.985 34.925,35.164 34.925,38.255 35.104,38.433 46.289,38.433 46.467,38.255 46.467,31.13 48.26,29.337 49.403,29.337 52.705,26.035 v1(52.705,21.209)
NetR8_2: R8.2 U4.5 | length 5.7
  Top Layer w0.305: U4.5@16.812,29.763 16.894,29.845 R8.2@22.508,29.845
NetR9_2: R9.2 U4.18 | length 5.6
  Top Layer w0.305: R9.2@1.27,26.035 1.395,25.91 6.858,25.91
NetR11_1: R11.1 U4.2 | length 8.2
  Top Layer w0.305: U4.2@16.812,26.463 19.257,26.463 19.558,26.162 19.558,24.384 20.701,23.241 R11.1@22.606,23.241
NetR12_1: R12.1 U4.3 | length 6.2
  Top Layer w0.305: U4.3@16.812,27.563 19.173,27.563 20.828,25.908 R12.1@22.352,25.908
NetR15_1: R15.1 U1.12 | length 3.6
  Top Layer w0.152: U1.12@46.776,7.727 48.534,7.727 48.989,7.272 R15.1@50.165,7.272
NetR16_1: R16.1 U2.AD10 | length 37.2
  Top Layer w0.1: U2.AD10@41.668,16.308 41.68,16.296 41.68,16.113 41.78,16.014 41.78,15.116 43.051,13.845 45.482,13.845 45.733,14.096 47.782,14.096 48.139,13.739 48.139,9.646 48.26,9.525 53.057,9.525 53.975,10.443 53.975,14.336 54.371,14.732 60.071,14.732 61.849,12.954 61.849,10.033 60.833,9.017 59.838,9.017 59.563,8.742 R16.1@59.563,8.73
NetR16_2: R16.2 U5.6 | length 2.7
  Top Layer w0.305: U5.6@56.953,8.016 59.212,8.016 59.25,7.978 59.39,7.978 59.563,7.805 R16.2@59.563,7.78
NetR20_1: R20.1 U4.11 | length 9
  Top Layer w0.305: R20.1@1.143,37.084 3.25,37.084 3.556,36.778 3.556,34.417 4.363,33.61 4.998,33.61 5.545,33.063 U4.11@7.112,33.063
NetR24_1: R24.1 R25.1 U3.3 | length 22.3
  Top Layer w0.305: U3.3@3.868,16.317 5.654,16.317 6.477,15.494 6.477,12.954 8.001,11.43 16.637,11.43 17.272,10.795 R25.1@19.876,10.795 ; R24.1@20.003,8.382 R25.1@20.003,10.922
NetR24_2: R24.2 U2.AD8 | length 27.3
  Top Layer w0.15: R24.2@21.653,8.382 23.241,8.382 23.876,9.017 23.876,12.446 26.635,15.205 31.842,15.205 33.147,16.51 36.83,16.51 38.862,14.478 40.78,14.478 40.995,14.692 40.995,16.101 41.168,16.274 U2.AD8@41.168,16.308
NetSWD_1: SWD.1 U2.AA24 | length 8.1
  Top Layer w0.12: U2.AA24@45.668,17.308 45.685,17.291 46.161,17.291 46.309,17.142 46.309,16.937 46.458,16.937 v1(46.482,16.913)
  Bottom Layer w0.12: v1(46.482,16.913) 46.528,16.867 46.815,16.867 47.282,16.4 48.1,16.4 48.142,16.358 48.241,16.358 48.773,16.891 51.816,16.891 SWD.1@52.705,17.78
NetSWD_2: SWD.2 U2.AC24 | length 10.9
  Bottom Layer w0.12: v2(45.71,16.814) 46.2,16.325 46.925,16.325 47.2,16.05 48.244,16.05 48.612,16.419 54.435,16.419 54.61,16.593 54.61,17.029 55.245,17.664 SWD.2@55.245,17.78
NetU1_3: U1.3 Y2.1 | length 7.4
  Top Layer w0.15: v1(44.577,3.429) 44.579,3.431 44.579,4.53 U1.3@44.581,4.532 ; Y2.1@49.106,1.739 49.106,2.694 49.276,2.864 v1(49.276,2.921)
  Bottom Layer w0.15: v1(44.577,3.429) 44.634,3.429 44.789,3.584 45.057,3.584 45.363,3.278 48.919,3.278 v1(49.276,2.921)
NetU1_4: U1.4 Y2.3 | length 5.3
  Top Layer w0.15: U1.4@45.081,4.532 45.081,3.306 45.72,2.667 45.72,1.125 46.806,0.039 Y2.3@46.906,0.039
NetU1_6: U1.6 U2.AC17 | length 16.4
  Top Layer w0.15: U1.6@46.081,4.532 46.081,4.373 46.136,4.318 v1(46.736,4.318)
  Bottom Layer w0.15: v2(43.45,16.8) 43.45,16.857 43.702,17.109 43.702,17.16 43.814,17.272 43.962,17.272 44.001,17.233 44.435,17.233 44.474,17.272 45.052,17.272 45.305,17.018 45.305,16.658 46.712,15.251 46.712,11.241 46.736,11.217 46.736,10.702 46.756,10.682 46.756,8.57 46.736,8.55 v1(46.736,4.318)
NetU1_13: U1.13 U2.AD16 | length 10.4
  Top Layer w0.15: U2.AD16@43.168,16.308 43.168,15.263 43.469,14.962 44.802,14.962 44.986,15.146 45.249,15.146 45.409,14.986 v1(45.466,14.986) ; v1(45.847,10.033) 45.847,9.976 46.091,9.732 46.091,8.432 U1.13@46.081,8.422
  Bottom Layer w0.15: v1(45.466,14.986) 45.466,10.414 v1(45.847,10.033)
NetU1_14: U1.14 U2.AD12 | length 13
  Top Layer w0.1: U2.AD12@42.168,16.308 42.168,16.261 42.046,16.138 42.046,15.231 42.926,14.351 45.871,14.351 v1(46.125,14.605) ; U1.14@45.581,8.422 45.587,8.428 45.587,9.102 45.686,9.201 v1(45.686,9.271)
  Bottom Layer w0.1: v1(45.686,9.271) 46.422,9.271 46.481,9.33 46.481,10.161 45.951,10.691 45.951,14.361 46.125,14.535 v1(46.125,14.605)
NetU1_15: U1.15 U2.AC21 | length 8.9
  Top Layer w0.1: U2.AC21@44.418,16.808 44.44,16.786 44.809,16.786 v2(44.831,16.764) ; U1.15@45.081,8.422 45.083,8.424 45.083,9.269 v1(45.085,9.271)
  Bottom Layer w0.1: v2(44.831,16.764) 44.831,16.313 44.852,16.292 44.852,11.917 45.085,11.684 v1(45.085,9.271)
NetU1_16: U1.16 U2.AC19 | length 9.1
  Top Layer w0.15: v1(44.529,9.192) 44.529,9.135 44.579,9.085 44.579,8.424 U1.16@44.581,8.422
  Bottom Layer w0.1: v2(43.95,16.803) 43.952,16.803 44.577,16.178
  Bottom Layer w0.15: v1(44.529,9.192) 44.507,9.214 44.507,10.391 44.069,10.829 44.069,11.68 44.577,12.188 44.577,16.178
NetU1_17: U1.17 U2.AD18 | length 8.2
  Top Layer w0.15: v1(43.572,10.033) 43.572,9.976 43.815,9.733 43.815,9.438 44.081,9.172 U1.17@44.081,8.422 ; v1(43.668,15.847) U2.AD18@43.668,16.308
  Bottom Layer w0.15: v1(43.572,10.033) 43.532,10.073 43.532,10.43 43.467,10.495 43.467,15.086 43.668,15.287 v1(43.668,15.847)
NetU1_18: U1.18 U2.AC15 | length 8.8
  Top Layer w0.15: v1(43.18,9.525) 43.237,9.525 43.409,9.353 43.475,9.353 43.581,9.247 U1.18@43.581,8.422
  Bottom Layer w0.15: v2(42.898,16.803) 42.938,16.763 42.938,16.489 43.22,16.207 43.22,15.264 43.167,15.211 43.167,9.538 v1(43.18,9.525)
NetU1_19: U1.19 U2.AD20 | length 10.1
  Top Layer w0.15: v1(42.672,8.255) 42.672,7.782 42.727,7.727 U1.19@42.886,7.727 ; U2.AD20@44.168,16.308 44.17,16.306 44.17,15.369 v1(44.172,15.367)
  Bottom Layer w0.15: v1(42.672,8.255) 42.712,8.295 42.8,8.295 42.887,8.382 43.688,8.382 43.915,8.609 43.915,9.322 43.997,9.404 43.997,10.477 43.767,10.707 43.767,14.962 v1(44.172,15.367)
NetU2_A14: U2.A14 U.1 | length 8.4
  Top Layer w0.15: U.1@40.767,30.436 40.767,25.781 42.668,23.88 U2.A14@42.668,22.808
NetU2_A16: U2.A16 U.2 | length 8.8
  Top Layer w0.15: U.2@42.037,30.436 41.951,30.35 41.951,29.466 41.148,28.663 41.148,26.035 43.168,24.015 U2.A16@43.168,22.808
NetU2_B15: U2.B15 U.6 | length 17.8
  Top Layer w0.305: v1(43.307,36.322) U.6@43.307,37.636
  Bottom Layer w0.203: v2(42.918,22.308) 42.918,25.265 45.72,28.067 45.72,31.877 44.577,33.02 44.069,33.02 43.307,33.782 v1(43.307,36.322)
NetU2_B17: U2.B17 U.5 | length 17.5
  Top Layer w0.152: v1(44.577,36.449) U.5@44.577,37.636
  Bottom Layer w0.152: v2(43.428,22.308) 43.428,25.013 46.609,28.194 46.609,33.147 45.085,34.671 45.085,35.941 v1(44.577,36.449)
NetU2_H23: U2.H23
NetU2_J24: U2.J24
NetU2_K2: U2.K2 U.7 | length 22.7
  Top Layer w0.305: v1(41.91,36.449) 41.981,36.52 41.981,37.58 U.7@42.037,37.636
  Bottom Layer w0.203: v2(39.668,20.068) 39.661,20.075 38.98,20.075 38.354,20.701 38.354,23.884 38.473,24.003 39.624,24.003 39.751,24.13 40.513,24.13 42.037,25.654 42.037,25.781 43.815,27.559 43.815,31.115 43.307,31.623 43.307,32.639 41.91,34.036 v1(41.91,36.449)
NetU2_L24: U2.L24
NetU2_M2: U2.M2 U.3 | length 15.9
  Top Layer w0.152: v1(42.926,29.464) 42.945,29.483 42.945,29.574 43.307,29.936 U.3@43.307,30.436
  Bottom Layer w0.152: v2(39.668,19.558) 38.785,19.558 37.719,20.624 37.719,24.257 38.354,24.892 39.878,24.892 41.021,26.035 41.021,28.448 42.037,29.464 v1(42.926,29.464)
NRF_VBUS: C21.1 R6.2 U2.AD2 | length 27.5
  Top Layer w0.305: R6.2@28.067,-4.611 v1(28.067,-3.175) ; C21.1@34.544,12.286 34.619,12.286 34.692,12.359 34.692,12.684 v1(34.816,12.809) ; v1(38.9,16.4) 38.911,16.389 39.535,16.389 39.617,16.308 U2.AD2@39.668,16.308
  Bottom Layer w0.305: v1(28.067,-3.175) 28.067,-1.651 32.64,2.922 32.64,3.174 32.638,3.176 32.638,3.428 33.528,4.318 33.528,11.684 34.653,12.809 v1(34.816,12.809) 35.542,12.809 37.216,14.483 37.216,14.716 v1(38.9,16.4)
V_EXTERN: C53.1 D1.2 D8.2 D9.5 F2.2 J1.4 Q4.1 R6.1 R30.1 R32.1 U6.2 U6.4 | length 83.7
  Top Layer w0.203: D9.5@34.647,-2.994 34.647,-3.646 34.671,-3.67 v1(34.671,-3.683)
  Top Layer w0.305: F2.2@37.719,-4.178 37.973,-3.924 v1(37.973,-3.429) ; Q4.1@48.235,-6.286 48.26,-6.312 v1(48.26,-6.985) ; v1(49.911,-6.858) R30.1@50.756,-6.858
  Top Layer w0.508: v1(0.635,2.712) D8.2@0.635,4.295 ; U6.2@17.66,-7.112 17.73,-7.182 18.358,-7.182 v1(18.542,-7.366) ; v1(23.368,-7.747) 24.016,-7.747 24.25,-7.513 U6.4@24.25,-7.112
  Top Layer w0.635: v1(3.727,2.66) 3.906,2.839 3.906,3.499 4.039,3.632 D1.2@4.064,3.632 ; v1(6.858,3.124) C53.1@6.858,3.746 ; v1(27.305,-6.223) 27.985,-6.223 28.067,-6.306 R6.1@28.067,-6.311 ; v1(44.196,-5.715) 44.215,-5.696 44.215,-4.838 J1.4@44.257,-4.796 ; v1(50.038,-4.826) R32.1@50.737,-4.826
  Int2 (PWR) w0.635: v1(0.635,2.712) 3.675,2.712 v1(3.727,2.66) 3.972,2.66 4.436,3.124 v1(6.858,3.124) 8.382,1.6 8.382,-0.762 15.748,-0.762 18.542,-3.556 v1(18.542,-7.366) 22.987,-7.366 v1(23.368,-7.747) 25.781,-7.747 v1(27.305,-6.223) 27.94,-6.858 30.861,-6.858 31.115,-7.112 42.799,-7.112 v1(44.196,-5.715) ; v1(34.671,-3.683) 37.719,-3.683 v1(37.973,-3.429) 41.91,-3.429 v1(44.196,-5.715) ; v1(50.038,-4.826) 50.038,-6.731 49.784,-6.985 45.466,-6.985 v1(44.196,-5.715)
VBAT: C44.1 C46.1 C47.1 C50.1 F1.2 J1.3 Q4.3 R26.2 | length 22
  Top Layer w0.305: R26.2@44.132,-10.16 44.195,-10.097 44.195,-7.459 J1.3@44.257,-7.396 44.257,-7.071 45.593,-5.735 v1(45.593,-5.334) Q4.3@46.253,-5.334 ; C50.1@47.744,-11.684 v1(48.387,-11.684) 48.4,-11.697 C44.1@48.4,-13.589
  Top Layer w0.635: C47.1@44.082,-12.7 v1(44.831,-12.7) ; R26.2@44.132,-10.16 44.132,-10.179 44.239,-10.287 v1(44.831,-10.287) ; C46.1@48.4,-9.525 48.4,-9.594 48.457,-9.652 v1(49.022,-9.652) ; v1(50.419,-10.795) F1.2@51.041,-10.795
  Int2 (PWR) w0.635: v1(44.831,-12.7) 44.831,-10.922 45.466,-10.287 ; v1(44.831,-10.287) 45.466,-10.287 ; v1(48.387,-11.684) 48.387,-10.913 48.015,-10.541 ; v1(50.419,-10.795) 50.165,-10.795 v1(49.022,-9.652) 48.133,-10.541 48.015,-10.541 ; 45.466,-10.287 45.72,-10.541 48.015,-10.541
VDD3V3: C51.1 C52.1 FB1.1 FB3.1 Q3.2 U3.5 | length 75.7
  Top Layer w0.305: C52.1@1.016,11.295 1.77,11.295 v1(1.778,11.303) ; C51.1@1.27,21.37 1.27,19.739 v1(1.286,19.723) ; U3.5@1.466,14.417 1.634,14.417 1.778,14.273 v1(1.778,11.303) ; v1(4.953,11.176) 1.905,11.176 v1(1.778,11.303) ; v1@11.176,19.558 v1(11.049,19.431) 11.06,19.42 11.115,19.42 11.849,18.686 Q3.2@11.938,18.686 ; v1(18.043,2.949) 18.058,2.949 18.134,2.873 FB1.1@19.05,2.873 ; v1(41.529,0.762) 42.751,0.762 FB3.1@42.799,0.714
  Int2 (PWR) w0.305: v1(1.778,11.303) 1.778,11.557 0.635,12.7 0.381,12.7 -0.254,13.335 -0.254,19.506 -0.038,19.723 1.435,19.723 1.726,19.431 v1(11.049,19.431) ; v1(4.953,11.176) 5.461,11.176 7.874,8.763 7.874,6.477 8.636,5.715 10.108,5.715 12.879,2.944 18.038,2.944 v1(18.043,2.949) ; v1@18.069,2.944 18.069,2.949 21.26,2.949 22.279,1.931 25.946,1.931 27.216,0.661 34.314,0.661 34.416,0.762 v1(41.529,0.762)
VDD_GPRS: C14.1 C19.1 FB4.2 U4.8 | length 29.4
  Top Layer w0.305: 15.031,33.61 15.578,33.063 U4.8@16.812,33.063 ; U4.8@16.812,33.02 21.86,33.02 C19.1@22.622,33.782 ; FB4.2@17.78,20.288 17.78,21.082 v1(17.907,21.209) 19.142,21.209 19.719,20.632 C14.1@20.955,20.632
  Int2 (PWR) w0.508: 15.031,33.61 15.076,33.655 18.415,33.655 19.126,32.944 19.126,27.826 17.45,26.15 17.45,21.666 v1(17.907,21.209)
VDD_LORA: C33.2 C34.1 FB3.2 U1.1 U1.10 U1.11 | length 21.2
  Top Layer w0.15: FB3.2@42.799,1.572 FB3.2@42.87,1.643 ; U1.1@43.581,4.532 43.581,4.242 42.966,3.627 42.966,3.469 v1(42.926,3.429) 42.926,1.699 FB3.2@42.87,1.643 ; C34.1@44.577,1.643 FB3.2@42.87,1.643 ; v1(47.752,7.239) 47.746,7.233 46.782,7.233 U1.11@46.776,7.227 U1.10@46.776,6.727 49.407,6.727 50.038,6.096 51.689,6.096 52.089,5.696 52.089,5.315 C33.2@52.324,5.08
  Int2 (PWR) w0.254: v1(42.926,3.429) 42.926,4.064 43.688,4.826 47.73,4.826 47.879,4.975 47.879,7.112 v1(47.752,7.239)
VDD_nrf: C9.1 C11.1 C12.1 C27.1 C28.1 C29.1 C30.1 FB1.2 GPIO_PINS.4 L1.1 R10.2 R13.2 SWD.4 U2.A22 U2.AD14 U2.AD23 U2.B1 U2.W1 U4.6 | length 154.8
  Top Layer w0.152: L1.1@36.676,18.307 37.192,18.307 37.615,17.884 38.077,17.884 v1(38.1,17.907) 38.537,17.907 38.636,17.808 U2.W1@39.168,17.808
  Top Layer w0.203: v1(38.862,22.733) 38.892,22.703 38.892,22.603 39.168,22.327 U2.B1@39.168,22.308 ; v1(42.545,15.621) 42.575,15.651 42.575,16.067 42.654,16.146 42.654,16.294 U2.AD14@42.668,16.308
  Top Layer w0.254: v1(41.656,27.559) 41.675,27.578 41.997,27.578 42.295,27.876 R13.2@42.545,27.876 ; C27.1@44.45,26.162 44.668,25.944 U2.A22@44.668,22.814 ; U2.A22@44.668,22.808 44.672,22.804 44.672,22.384 v2(44.704,22.352) ; U2.AD23@45.168,16.308 45.172,16.304 45.172,15.915 v1(45.339,15.748)
  Top Layer w0.305: C30.1@16.383,3.81 v1(16.383,4.445) ; U4.6@16.812,30.863 18.275,30.863 18.527,31.115 v1(18.542,31.115) 18.557,31.115 18.852,31.41 18.964,31.41 19.558,32.004 C11.1@22.479,32.004 ; FB1.2@19.05,3.731 v1(19.05,4.445) ; v1(22.098,4.572) 22.098,3.977 22.171,3.904 C12.1@22.225,3.904 ; L1.1@36.449,18.534 L1.1@36.676,18.307 ; v1(41.402,10.033) 41.532,10.033 42.041,10.542 R10.2@42.291,10.542 ; v1(44.172,13.081) 44.172,13.066 44.352,12.886 44.352,12.409 C29.1@44.45,12.311 46.347,12.311 C9.1@46.482,12.446
  Int2 (PWR) w0.152: v1(38.862,22.733) 38.011,22.733 37.465,22.187 37.465,18.161 37.691,17.935 38.072,17.935 v1(38.1,17.907) 38.1,16.002 38.481,15.621 40.767,15.621 41.021,15.367 42.672,15.367 42.81,15.505
  Int2 (PWR) w0.254: v1@41.656,27.541 41.656,25.641 44.684,22.613 44.684,22.372 v2(44.704,22.352) 47.396,22.352 47.752,21.996 47.752,18.2 48.26,17.692 48.26,16.69 48.2,16.63 v1@48.2,15.6 ; v1(42.545,15.621) 42.811,15.621 ; 42.811,15.514 43.362,14.963 43.894,14.963 ; 43.983,14.91 44.196,14.91 44.501,14.91 v1(45.339,15.748) 45.355,15.732 45.609,15.732 46.101,15.24 46.956,15.24 47.316,15.6 47.55,15.6 47.586,15.564 v1(48.238,15.564)
  Int2 (PWR) w0.305: v1(14.097,14.212) 14.097,14.874 13.97,15.001 13.97,21.844 12.573,23.241 12.573,30.48 13.208,31.115 v1(18.542,31.115) ; v1(14.478,10.668) 14.478,6.35 v1(16.383,4.445) v1(19.05,4.445) v1@21.971,4.445 ; v1(22.098,4.572) 24.511,4.572 v1(25.146,3.937) 25.908,3.937 27.178,5.207 32.206,5.207 32.385,5.386 32.385,5.588 35.433,8.636 40.005,8.636 44.161,12.792 44.161,13.07 v1(44.172,13.081) ; 43.362,14.963 43.44,14.885 43.894,14.885 44.069,14.885 44.196,14.758 44.196,13.939 44.172,13.915 44.172,13.105 v1@44.196,13.081
  Bottom Layer w0.254: v1(48.238,15.564) 49.115,15.564 49.553,16.002 59.436,16.002
  Bottom Layer w0.305: v1(14.097,14.212) 14.097,12.954 14.605,12.446 14.605,10.795 v1(14.478,10.668) ; 59.436,16.002 59.436,16.596
  Bottom Layer w0.508: GPIO_PINS.4@59.309,29.972 59.391,29.89 60.871,29.89 61.341,29.42 61.341,18.796 SWD.4@60.325,17.78 60.325,17.485 59.436,16.596
VDD_POWR: C31.2 D3.2 D4.2 D5.2 FB4.1 Q3.3 U.8 | length 73.7
  Top Layer w0.254: Q3.3@13.919,19.639 14.042,19.516 14.669,19.516 14.881,19.304 C31.2@15.748,19.304 15.875,19.431 v1(16.764,19.431) FB4.1@17.78,19.431 ; D5.2@48.768,10.472 49.969,10.472 v1(50.165,10.668) 50.223,10.726 D3.2@51.816,10.726
  Top Layer w0.305: D4.2@37.465,37.407 37.563,37.309 38.214,37.309 38.347,37.176 38.728,37.176 39.187,37.636 U.8@40.767,37.636
  Top Layer w0.508: Q3.3@13.919,19.639 Q3.3@13.945,19.664
  Int2 (PWR) w0.508: v1(16.764,19.431) 18.669,19.431 21.59,22.352 25.019,22.352 29.083,26.416 29.083,28.575 31.369,30.861 34.87,30.861 34.997,30.988 39.243,30.988 ; v1(38.496,37.176) 39.243,36.429 39.243,30.988 ; v1(50.165,10.668) 50.165,15.367 50.546,15.748 50.546,19.177 50.038,19.685 50.038,24.765 43.815,30.988 39.243,30.988
VDDH: C15.1 FB2.1 U2.Y2 | length 7
  Top Layer w0.15: C15.1@33.655,15.509 35.387,15.509 FB2.1@35.433,15.462 35.433,15.484 35.644,15.695 35.666,15.695 35.719,15.748 v1(36.195,15.748) ; v2(39.634,17.558) U2.Y2@39.668,17.558
  Bottom Layer w0.15: v1(36.195,15.748) 36.235,15.708 36.487,15.708 36.494,15.7 36.909,15.7 38.608,17.399 39.441,17.399 39.6,17.558 v2(39.634,17.558)
pads on no net: D9.4 D9.6 D9.7 D9.9 D9.10 J6. J6.A8 U2.A8 U2.A10 U2.A12 U2.A18 U2.AC11 U2.AD22 U2.B9 U2.B11 U2.B13 U2.B19 U2.G1 U2.H2 U2.L1 U2.N1 U2.P23 U2.T2 U3.4 U4.7 U4.10 U4.13 U4.15 U4.16 U4.17 Y3.2 Y3.3
copper on no net:
  other v1: 51.435,5.461 51.435,5.461

## Polygon pours and split planes (outlines as drawn)
GND on Int1 (GND) "NONET_L03_P-001" (solid, pour order 0): -1.524,-15.621 -2.159,-14.986 -2.159,38.227 -1.27,39.116 61.849,39.116 62.484,38.481 62.484,-14.732 61.595,-15.621 0.508,-15.621
GND on Bottom Layer "NONET_L03_P-001" (solid, remove dead copper, pour order 2): -2.286,38.481 -1.524,39.243 61.849,39.243 62.611,38.481 62.611,-14.859 61.722,-15.748 -1.397,-15.748 -2.286,-14.859 -2.286,37.973
GND on Top Layer "NONET_L03_P-001" (solid, remove dead copper, pour order 3): -2.313,38.502 -1.551,39.264 61.822,39.264 62.584,38.502 62.584,-14.838 61.695,-15.727 -1.424,-15.727 -2.313,-14.838 -2.313,-14.711
GND on Int2 (PWR) "NONET_L03_P-001" (solid, pour order 6): -2.286,38.481 -1.524,39.243 61.849,39.243 62.611,38.481 62.611,-14.859 61.722,-15.748 -1.397,-15.748 -2.286,-14.859 -2.286,-13.843

## Other copper
Int2 (PWR):

## Silkscreen, mask and mechanical layers (free items; w line width, h text height)
Top Overlay:
  text "VDD" at 60.808,29.884 h0.52
  text "GND" at 61.004,27.154 h0.52
  text "R24" at 61.054,24.604 h0.52
  text "U24" at 60.808,21.774 h0.52
  text "GND" at 57.596,19.504 h0.52 r90
  text "CLK" at 52.997,19.279 h0.52 r90
  text "SWDIO" at 55.417,19.279 h0.52 r90
  text "5V" at 2.575,9.107 h0.52
  text "GND" at -1.496,7.504 h0.52
  text "GND" at 55.754,-3.246 h0.52
  text "GND" at 0.804,-10.346 h0.62
Mechanical 1:
  lines w0.254: 62.611,-0.508 62.611,37.973 ccw(c61.341,37.973) 61.341,39.243 4.445,39.243 -1.016,39.243 ccw(c-1.016,37.973) -2.286,37.973 -2.286,-14.478 ccw(c-1.016,-14.478) -1.016,-15.748 61.341,-15.748 ccw(c61.341,-14.478) 62.611,-14.478 62.611,-0.254